# EAGLE board Flex_PCB_IMS_v1 (EAGLE 9.6.2)
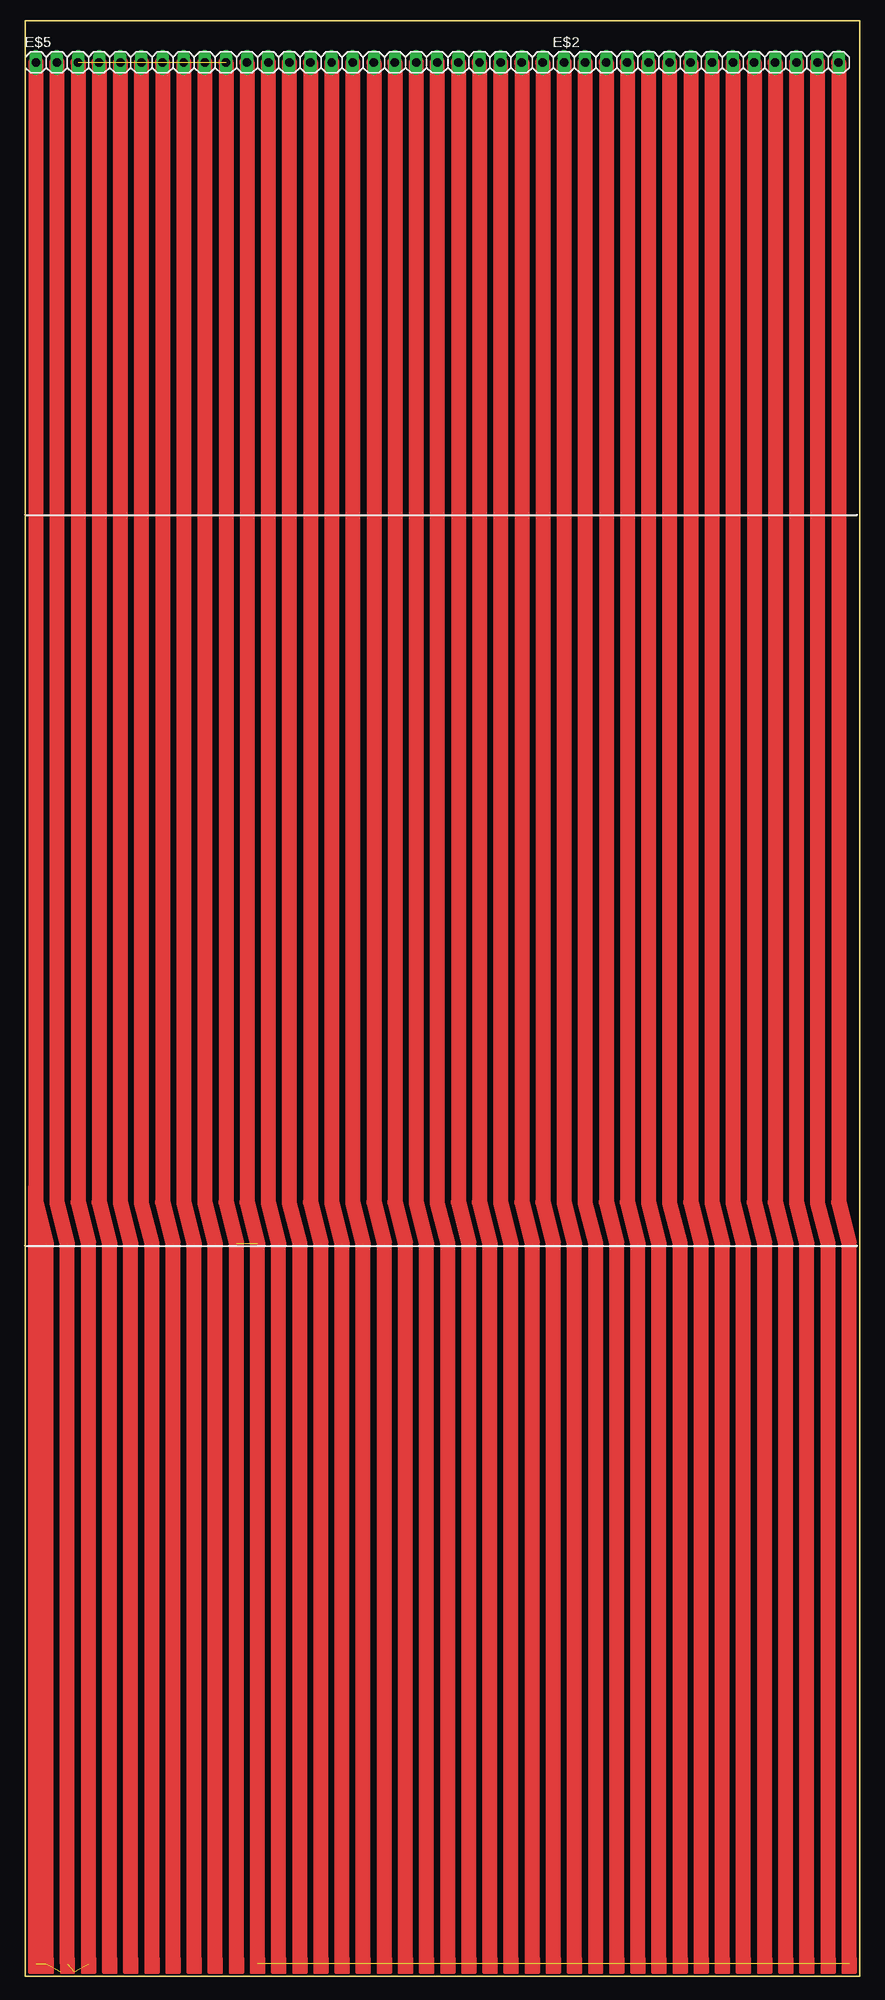
[diagram p0: board, top side]

Size 100.33 x 235 mm. Coordinates in mm from the lower left corner, seen from the top.
Outline: 100.33,0 0,0 0,235 100.33,235 100.33,0
Copper layers (1*16): Top 0.035mm / dielectric 1.5mm / Bottom 0.035mm
Design rules "default *": minimum track width 6mil, minimum drill 0.35mm, track to track 6mil, track to pad 6mil, pad to pad 6mil, via to via 6mil, smd to smd 0mil, copper to edge 40mil, drill to drill 6mil, minimum pad ring 10mil, minimum via ring 8mil, stop-mask expansion 4mil, vias tented up to drill 0mil, thermal gap 10mil

## Footprints (pad centres in the part's own frame; a part is rotated, then mirrored left to right if it is on the bottom)
1X14 = drill 1.016 long: 1 -16.51,0; 2 -13.97,0; 3 -11.43,0; 4 -8.89,0; 5 -6.35,0; 6 -3.81,0; 7 -1.27,0; 8 1.27,0; 9 3.81,0; 10 6.35,0; 11 8.89,0; 12 11.43,0; 13 13.97,0; 14 16.51,0
1X25 = drill 1.016 long: 1 -29.21,0; 2 -26.67,0; 3 -24.13,0; 4 -21.59,0; 5 -19.05,0; 6 -16.51,0; 7 -13.97,0; 8 -11.43,0; 9 -8.89,0; 10 -6.35,0; 11 -3.81,0; 12 -1.27,0; 13 1.27,0; 14 3.81,0; 15 6.35,0; 16 8.89,0; 17 11.43,0; 18 13.97,0; 19 16.51,0; 20 19.05,0; 21 21.59,0; 22 24.13,0; 23 26.67,0; 24 29.21,0; 25 31.75,0

## Placement (x,y rotation side)
E$2  [1X14]  81.28,230 0 top
E$5  [1X25]  30.48,230 0 top

## Library data of the parts
E$2 E$5 = pinhead

## Nets
S$4: E$5.4
S$5: E$5.5
S$6: E$5.6
S$7: E$5.7
S$8: E$5.8
S$9: E$5.9
S$10: E$5.10
V1: E$5.1 E$5.2 E$5.3

## Tracks (layer width: path | path; a pad name or v marks a point on that pad's centre or on a via)
V1  (79 unrouted)
  Top 0.178: 5.89,0.51 5.89,0.38 arc-90 5.84,0.33 4.32,0.33 arc-90 4.27,0.38 4.27,0.51
  Top 1.8: 7.62,1.5 7.62,88 | 5.08,1.5 5.08,88 | 2.54,1.5 2.54,88 | 1.27,1.5 1.27,95 | 22.86,1.5 22.86,88 | 20.32,1.5 20.32,88 | 12.7,1.5 12.7,88 | 10.16,1.5 10.16,88 | 68.58,1.5 68.58,88 | 66.04,1.5 66.04,88 | 53.34,1.5 53.34,88 | 50.8,1.5 50.8,88 | 17.78,1.5 17.78,88 | 15.24,1.5 15.24,88 | 27.94,1.5 27.94,88 | 25.4,1.5 25.4,88 | 83.82,1.5 83.82,88 | 81.28,1.5 81.28,88 | 33.02,1.5 33.02,88 | 30.48,1.5 30.48,88 | 38.1,1.5 38.1,88 | 35.56,1.5 35.56,88 | 43.18,1.5 43.18,88 | 40.64,1.5 40.64,88 | 48.26,1.5 48.26,88 | 45.72,1.5 45.72,88 | 58.42,1.5 58.42,88 | 55.88,1.5 55.88,88 | 63.5,1.5 63.5,88 | 60.96,1.5 60.96,88 | 73.66,1.5 73.66,88 | 71.12,1.5 71.12,88 | 78.74,1.5 78.74,88 | 76.2,1.5 76.2,88 | 88.9,1.5 88.9,88 | 86.36,1.5 86.36,88 | 93.98,1.5 93.98,88 | 91.44,1.5 91.44,88 | 99.06,1.5 99.06,88 | 96.52,1.5 96.52,88 | 99.06,88.01 97.79,93 97.79,230 | 95.25,230 95.25,93 96.52,88.01 | 93.98,88.01 92.71,93 92.71,230 | 19.05,230 19.05,93 20.32,88.01 | 21.59,230 21.59,93 22.86,88.01 | E$5.1 1.27,93 2.54,88.01 | E$5.2 3.81,93 5.08,88.01 | E$5.3 6.35,93 7.62,88.01 | 8.89,230 8.89,93 10.16,88.01 | 11.43,230 11.43,93 12.7,88.01 | 13.97,230 13.97,93 15.24,88.01 | 16.51,230 16.51,93 17.78,88.01 | 24.13,230 24.13,93 25.4,88.01 | 26.67,230 26.67,93 27.94,88.01 | 29.21,230 29.21,93 30.48,88.01 | 31.75,230 31.75,93 33.02,88.01 | 44.45,230 44.45,93 45.72,88.01 | 46.99,230 46.99,93 48.26,88.01 | 39.37,230 39.37,93 40.64,88.01 | 41.91,230 41.91,93 43.18,88.01 | 34.29,230 34.29,93 35.56,88.01 | 36.83,230 36.83,93 38.1,88.01 | 59.69,230 59.69,93 60.96,88.01 | 62.23,230 62.23,93 63.5,88.01 | 54.61,230 54.61,93 55.88,88.01 | 57.15,230 57.15,93 58.42,88.01 | 49.53,230 49.53,93 50.8,88.01 | 52.07,230 52.07,93 53.34,88.01
  Top 1.8: 64.77,230 64.77,93 66.04,88.01 | 67.31,230 67.31,93 68.58,88.01 | 69.85,230 69.85,93 71.12,88.01 | 72.39,230 72.39,93 73.66,88.01 | 74.93,230 74.93,93 76.2,88.01 | 77.47,230 77.47,93 78.74,88.01 | 80.01,230 80.01,93 81.28,88.01 | 82.55,230 82.55,93 83.82,88.01 | 85.09,230 85.09,93 86.36,88.01 | 87.63,230 87.63,93 88.9,88.01 | 90.17,230 90.17,93 91.44,88.01
V2
  Top 0.178: 8.43,0.51 8.43,0.38 arc-90 8.38,0.33 6.86,0.33 arc-90 6.81,0.38 6.81,0.51
V3
  Top 0.178: 10.97,0.51 10.97,0.38 arc-90 10.92,0.33 9.4,0.33 arc-90 9.35,0.38 9.35,0.51
V4
  Top 0.178: 13.51,0.51 13.51,0.38 arc-90 13.46,0.33 11.94,0.33 arc-90 11.89,0.38 11.89,0.51
V5
  Top 0.178: 16.05,0.51 16.05,0.38 arc-90 16,0.33 14.48,0.33 arc-90 14.43,0.38 14.43,0.51
V6
  Top 0.178: 21.13,0.51 21.13,0.38 arc-90 21.08,0.33 19.56,0.33 arc-90 19.51,0.38 19.51,0.51
V7
  Top 0.178: 18.59,0.51 18.59,0.38 arc-90 18.54,0.33 17.02,0.33 arc-90 16.97,0.38 16.97,0.51
V8
  Top 0.178: 23.67,0.51 23.67,0.38 arc-90 23.62,0.33 22.1,0.33 arc-90 22.05,0.38 22.05,0.51
V9
  Top 0.178: 26.21,0.51 26.21,0.38 arc-90 26.16,0.33 24.64,0.33 arc-90 24.59,0.38 24.59,0.51
V10
  Top 0.178: 28.75,0.51 28.75,0.38 arc-90 28.7,0.33 27.18,0.33 arc-90 27.13,0.38 27.13,0.51
V11
  Top 0.178: 31.29,0.51 31.29,0.38 arc-90 31.24,0.33 29.72,0.33 arc-90 29.67,0.38 29.67,0.51
V12
  Top 0.178: 33.83,0.51 33.83,0.38 arc-90 33.78,0.33 32.26,0.33 arc-90 32.21,0.38 32.21,0.51
V13
  Top 0.178: 36.37,0.51 36.37,0.38 arc-90 36.32,0.33 34.8,0.33 arc-90 34.75,0.38 34.75,0.51
V14
  Top 0.178: 38.91,0.51 38.91,0.38 arc-90 38.86,0.33 37.34,0.33 arc-90 37.29,0.38 37.29,0.51
V15
  Top 0.178: 41.45,0.51 41.45,0.38 arc-90 41.4,0.33 39.88,0.33 arc-90 39.83,0.38 39.83,0.51
V16
  Top 0.178: 43.99,0.51 43.99,0.38 arc-90 43.94,0.33 42.42,0.33 arc-90 42.37,0.38 42.37,0.51
V17
  Top 0.178: 46.53,0.51 46.53,0.38 arc-90 46.48,0.33 44.96,0.33 arc-90 44.91,0.38 44.91,0.51
V18
  Top 0.178: 49.07,0.51 49.07,0.38 arc-90 49.02,0.33 47.5,0.33 arc-90 47.45,0.38 47.45,0.51
V19
  Top 0.178: 51.61,0.51 51.61,0.38 arc-90 51.56,0.33 50.04,0.33 arc-90 49.99,0.38 49.99,0.51
V20
  Top 0.178: 54.15,0.51 54.15,0.38 arc-90 54.1,0.33 52.58,0.33 arc-90 52.53,0.38 52.53,0.51
V21
  Top 0.178: 56.69,0.51 56.69,0.38 arc-90 56.64,0.33 55.12,0.33 arc-90 55.07,0.38 55.07,0.51
V22
  Top 0.178: 59.23,0.51 59.23,0.38 arc-90 59.18,0.33 57.66,0.33 arc-90 57.61,0.38 57.61,0.51
V23
  Top 0.178: 61.77,0.51 61.77,0.38 arc-90 61.72,0.33 60.2,0.33 arc-90 60.15,0.38 60.15,0.51
V24
  Top 0.178: 64.31,0.51 64.31,0.38 arc-90 64.26,0.33 62.74,0.33 arc-90 62.69,0.38 62.69,0.51
V25
  Top 0.178: 66.85,0.51 66.85,0.38 arc-90 66.8,0.33 65.28,0.33 arc-90 65.23,0.38 65.23,0.51
V26
  Top 0.178: 69.39,0.51 69.39,0.38 arc-90 69.34,0.33 67.82,0.33 arc-90 67.77,0.38 67.77,0.51
V27
  Top 0.178: 71.93,0.51 71.93,0.38 arc-90 71.88,0.33 70.36,0.33 arc-90 70.31,0.38 70.31,0.51
V28
  Top 0.178: 74.47,0.51 74.47,0.38 arc-90 74.42,0.33 72.9,0.33 arc-90 72.85,0.38 72.85,0.51
V29
  Top 0.178: 77.01,0.51 77.01,0.38 arc-90 76.96,0.33 75.44,0.33 arc-90 75.39,0.38 75.39,0.51
V30
  Top 0.178: 79.55,0.51 79.55,0.38 arc-90 79.5,0.33 77.98,0.33 arc-90 77.93,0.38 77.93,0.51
V31
  Top 0.178: 82.09,0.51 82.09,0.38 arc-90 82.04,0.33 80.52,0.33 arc-90 80.47,0.38 80.47,0.51
V32
  Top 0.178: 84.63,0.51 84.63,0.38 arc-90 84.58,0.33 83.06,0.33 arc-90 83.01,0.38 83.01,0.51
V33
  Top 0.178: 87.17,0.51 87.17,0.38 arc-90 87.12,0.33 85.6,0.33 arc-90 85.55,0.38 85.55,0.51
V34
  Top 0.178: 89.71,0.51 89.71,0.38 arc-90 89.66,0.33 88.14,0.33 arc-90 88.09,0.38 88.09,0.51
V35
  Top 0.178: 92.25,0.51 92.25,0.38 arc-90 92.2,0.33 90.68,0.33 arc-90 90.63,0.38 90.63,0.51
V36
  Top 0.178: 94.79,0.51 94.79,0.38 arc-90 94.74,0.33 93.22,0.33 arc-90 93.17,0.38 93.17,0.51
V37
  Top 0.178: 97.33,0.51 97.33,0.38 arc-90 97.28,0.33 95.76,0.33 arc-90 95.71,0.38 95.71,0.51
V38
  Top 0.178: 99.87,0.51 99.87,0.38 arc-90 99.82,0.33 98.3,0.33 arc-90 98.25,0.38 98.25,0.51
V39
  Top 0.178: 3.35,0.51 3.35,0.38 arc-90 3.3,0.33 1.78,0.33 arc-90 1.73,0.38 1.73,0.51
V40
  Top 0.178: 2.08,0.51 2.08,0.38 arc-90 2.03,0.33 0.51,0.33 arc-90 0.46,0.38 0.46,0.51
(copper drawn outside any net)
  shapes: Top area x40